# Altium PCB ArmRev2.PcbDoc
Units mm, origin at the board's own origin, x right, y up, seen from the top; angles counter-clockwise.
Board outline 81.53 x 68.07 mm, 2 copper layers (Top Layer, Bottom Layer); 82 components, 52 nets, 280 pads, 92 vias.
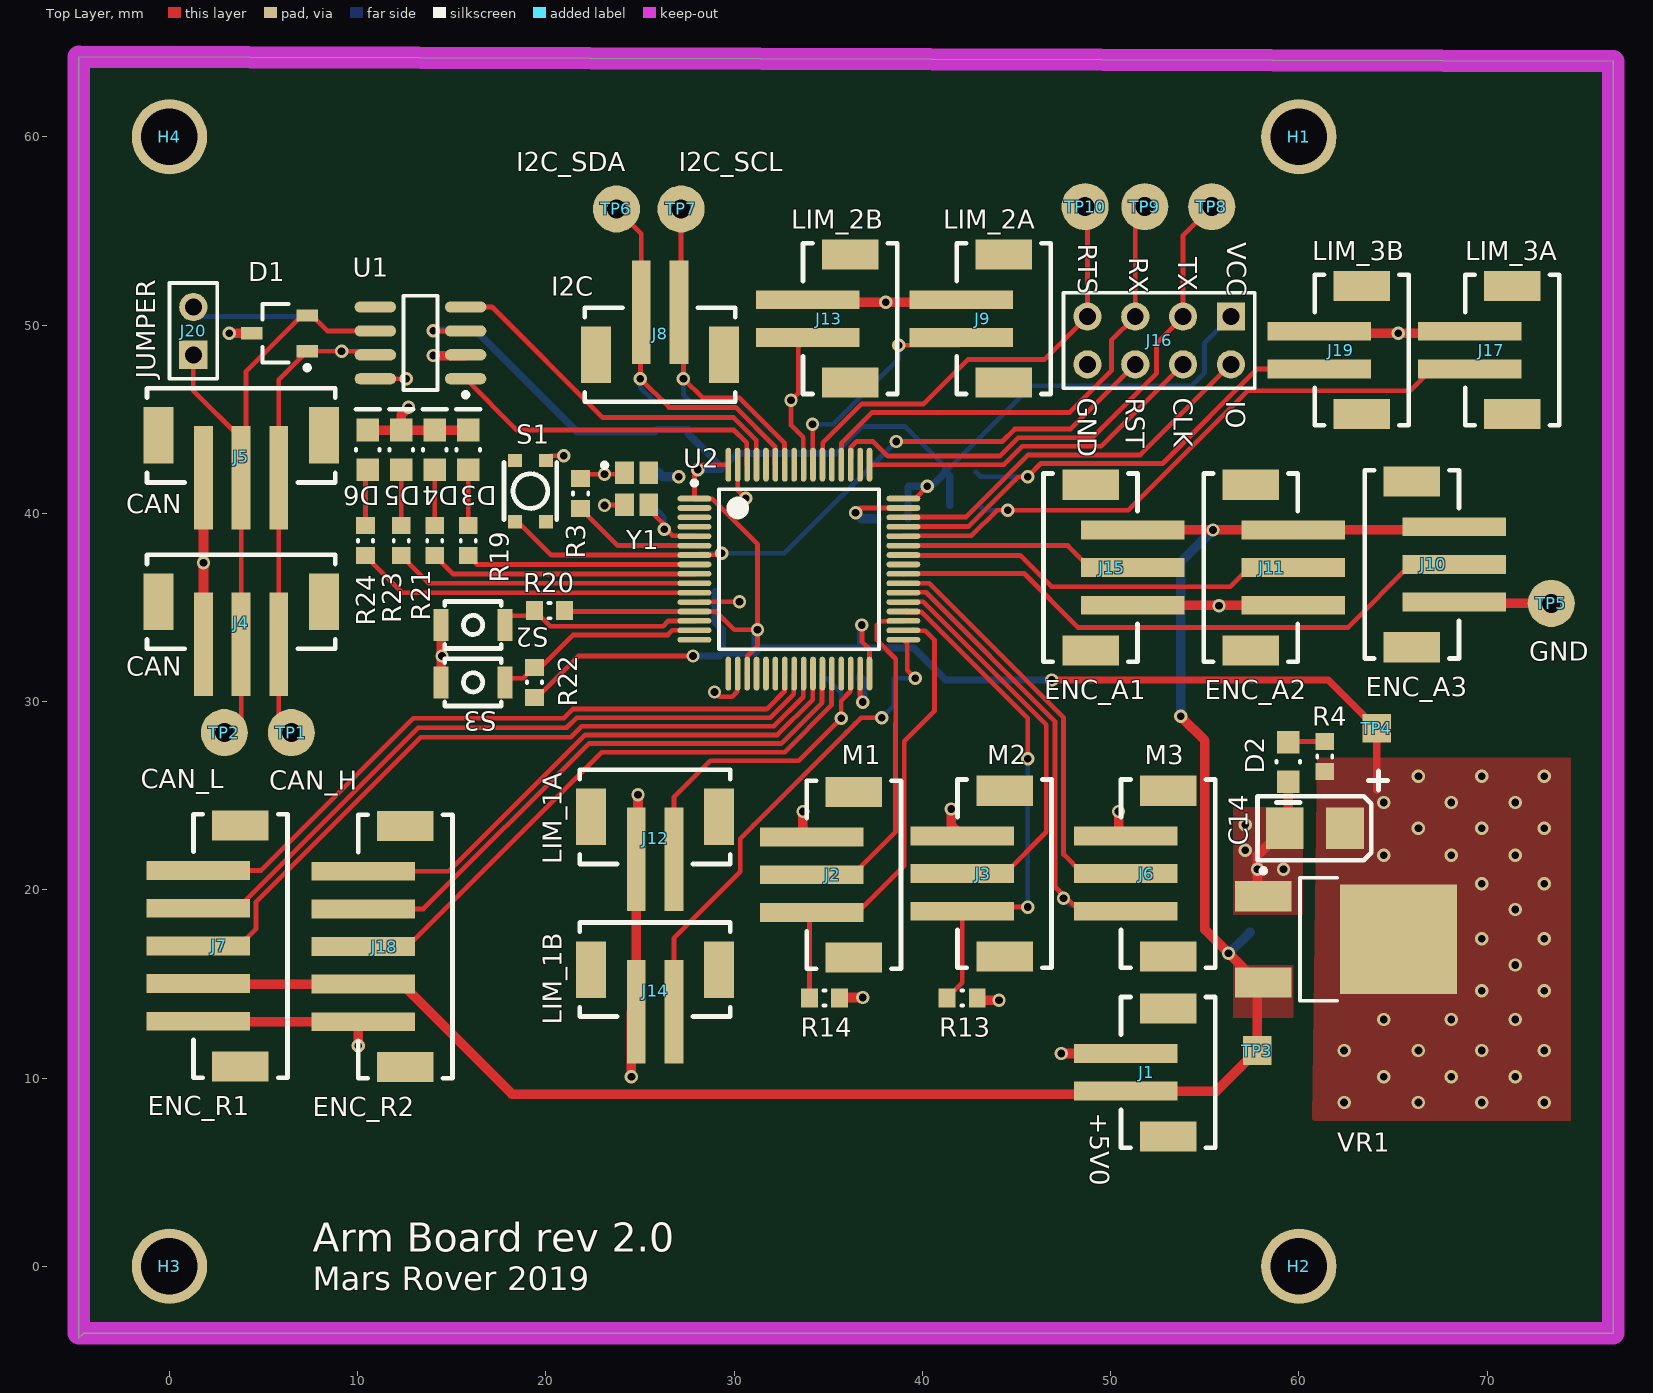
[diagram p0: Top Layer view]
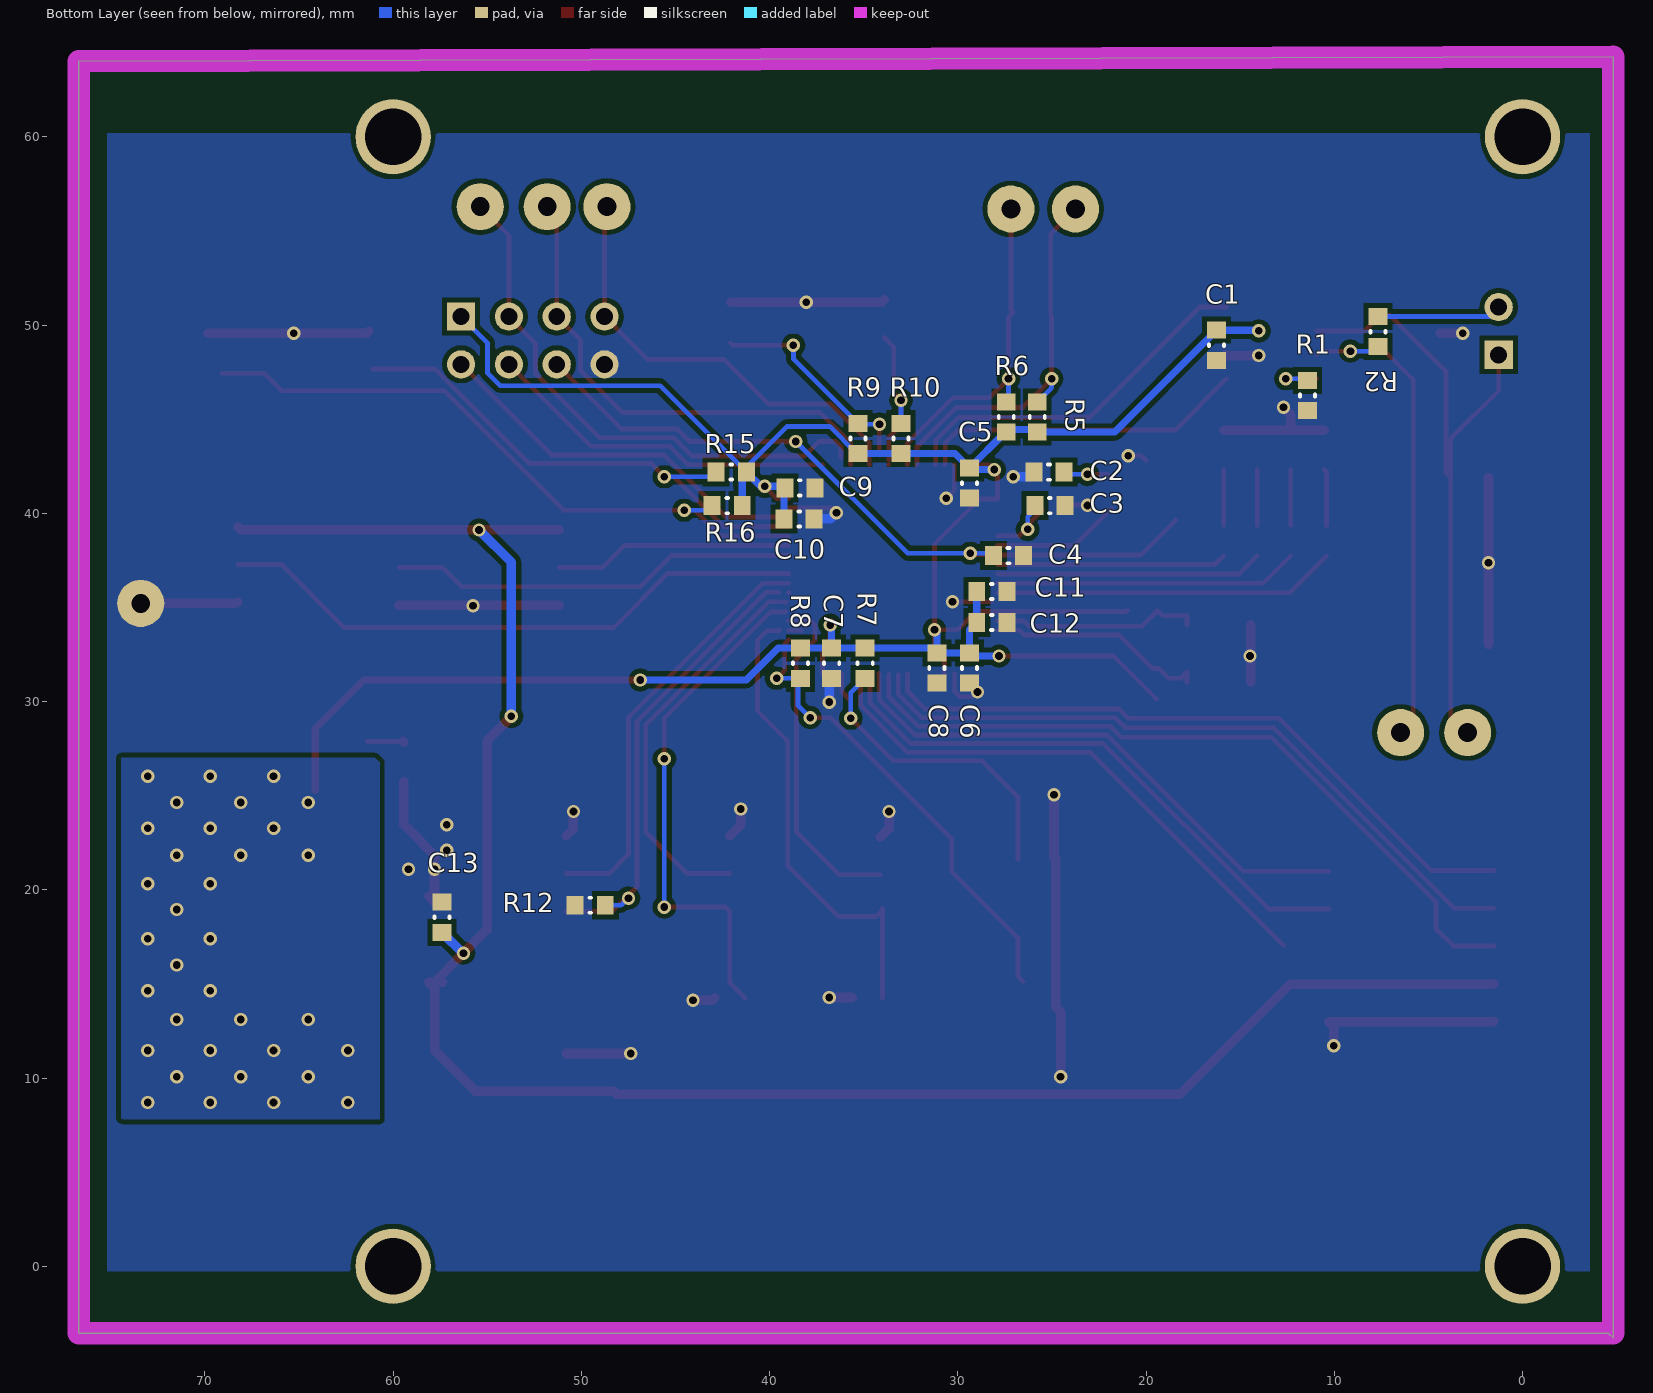
[diagram p1: Bottom Layer view, seen from below]

## Layer stack, top to bottom
Top Solder: solder mask 0.0102, Solder Resist, Dk 3.5
Top Layer: signal copper 0.0356
Dielectric 1: dielectric 0.32, FR-4, Dk 4.8
Bottom Layer: signal copper 0.0356
Bottom Solder: solder mask 0.0102, Solder Resist, Dk 3.5

## Board outline
-4.826,64.262 -4.826,-3.81 -4.572,-3.556 76.708,-3.556 76.708,64.008

## Design rules (kind name [scope] priority, off if disabled: settings)
Clearance Clearance_1 [All] p1: gap=0.254 ignorepadtopadclearanceinfootprint=TRUE except(0: Arc-Hole Track-Hole SMDPad-Hole THPad-Hole Via-Hole Fill-Hole Poly-Hole Region-Hole Text-Hole; 0.203: Arc-Arc Arc-Track Arc-SMDPad Track-Track Track-SMDPad)
HoleSize [All] p1: absolutevalues=TRUE maxlimit=3.5 minlimit=0.025 maxpercent=80.000 minpercent=20.000
PolygonConnect [All] p1: connectstyle=Direct reliefconductorwidth=0.254 reliefentries=4 polygonreliefangle="90 Angle" airgapwidth=0.254
RoutingVias [All] p1: holewidth=0.406 width=0.711 viastyle="Through Hole" minholewidth=0.406 minwidth=0.711 maxholewidth=0.711 maxwidth=1.27
SolderMaskExpansion [All] p1: expansion=0.102
Width [All] p1: maxlimit=0.508 minlimit=0.254 preferedwidth=0.254 minimp=50.000000 maximp=50.000000 favimp=50.000000
29 further rules are at their usual default settings.

## Classes and differential pairs
component class Support: D3 D4 D5 D6 R5 R6 R7 R8 R9 R10 R12 R13 R14 R15 R16 R19 R20 R21 R22 R23 R24 S2 S3 TP6 TP7 TP8 TP9 TP10
component class POWER: C13 C14 D2 R4 TP3 TP4 TP5 VR1
component class MCU: C2 C3 C4 C5 C6 C7 C8 C9 C10 C11 C12 H1 H2 H3 H4 R3 S1 U2 Y1
component class Connectors: J1 J2 J3 J4 J5 J6 J7 J8 J9 J10 J11 J12 J13 J14 J15 J16 J17 J18 J19
component class CAN: C1 D1 J20 R1 R2 TP1 TP2 U1

## Components (designator, comment, footprint, x,y, rotation, side; value= is the part's Value field where it differs from the comment)
C1 "CAP_0.1uF_16V_0603" CAPC0603(1608)55_N 16.256,48.927 r90 bottom value=0.1uF
C2 "CAP_15pF_0603" CAPC0603(1608)55_N 25.159,42.186 r180 bottom value=15pF
C3 "CAP_15pF_0603" CAPC0603(1608)55_N 25.108,40.408 r0 bottom value=15pF
C4 "CAP_0.1uF_16V_0603" CAPC0603(1608)55_N 27.305,37.751 r0 bottom value=0.1uF
C5 "CAP_0.1uF_16V_0603" CAPC0603(1608)55_N 29.375,41.605 r90 bottom value=0.1uF
C6 "CAP_0.1uF_16V_0603" CAPC0603(1608)55_N 29.375,31.782 r90 bottom value=0.1uF
C7 "CAP_0.1uF_16V_0603" CAPC0603(1608)55_N 36.703,32.036 r90 bottom value=0.1uF
C8 "CAP_4.7uF_0603" CAPC0603(1608)55_N 31.115,31.782 r90 bottom value=4.7uF
C9 "CAP_0.1uF_16V_0603" CAPC0603(1608)55_N 38.392,41.351 r0 bottom value=0.1uF
C10 "CAP_0.1uF_16V_0603" CAPC0603(1608)55_N 38.43,39.7 r0 bottom value=0.1uF
C11 "CAP_10nF_0603" CAPC0603(1608)55_N 28.194,35.846 r0 bottom value=10nF
C12 "CAP_1uF_16V_0603" CAPC0603(1608)55_N 28.194,34.195 r0 bottom value=1uF
C13 "CAP_0.33uF_16V_0603" CAPC0603(1608)55_N 57.404,18.542 r270 bottom value=0.33uF
C14 "CAP_10uF_0603_POL" AVX-CAPC3528_V 60.846,23.273 r180 top value=10uF
D1 "TVS_DIODE_CAN" TVS_DIODE_CAN 5.842,49.562 r180 top
D2 "DIO_LED_R" LED_0805_LINE 59.436,26.797 r270 top
D3 "DIO_LED_Y" LED_0805_LINE 15.875,43.373 r90 top
D4 "DIO_LED_G" LED_0805_LINE 14.097,43.373 r90 top
D5 "DIO_LED_G" LED_0805_LINE 12.319,43.373 r90 top
D6 "DIO_LED_G" LED_0805_LINE 10.541,43.373 r90 top
H1 "MOUNTING_HOLES" MOUNTING_HOLE#1 133.604,-13.081 r0 top
H2 "MOUNTING_HOLES" MOUNTING_HOLE#2 1.961,17.836 r0 top
H3 "MOUNTING_HOLES" MOUNTING_HOLE#3 123.063,-13.081 r0 top
H4 "MOUNTING_HOLES" MOUNTING_HOLE#4 1.961,17.836 r0 top
J1 "+5V0" JST-B2B-SM4-TB 55.55,10.303 r90 top
J2 "M1" JST-B3B-SM4-TB 38.862,20.799 r90 top
J3 "M2" JST-B3B-SM4-TB 46.863,20.86 r90 top
J4 "CAN" JST-B3B-SM4-TB 3.81,37.802 r180 top
J5 "CAN" JST-B3B-SM4-TB 3.81,46.641 r180 top
J6 "M3" JST-B3B-SM4-TB 55.55,20.86 r90 top
J7 "ENC_R1" JST-B5B-SM4-TB 6.274,17.018 r90 top
J8 "I2C" JST-B2B-SM4-TB 26.064,45.919 r0 top
J9 "LIM_2A" JST-B2B-SM4-TB 46.823,50.34 r90 top
J10 "ENC_A3" JST-B3B-SM4-TB 63.5,37.283 r270 top
J11 "ENC_A2" JST-B3B-SM4-TB 54.94,37.116 r270 top
J12 "LIM_1A" JST-B2B-SM4-TB 25.797,26.372 r180 top
J13 "LIM_2B" JST-B2B-SM4-TB 38.659,50.34 r90 top
J14 "LIM_1B" JST-B2B-SM4-TB 25.797,18.265 r180 top
J15 "ENC_A1" JST-B3B-SM4-TB 46.431,37.116 r270 top
J16 "HEADER 4X2" HEADER_2X4 56.388,50.451 r180 top
J17 "LIM_3A" JST-B2B-SM4-TB 73.838,48.673 r90 top
J18 "ENC_R2" JST-B5B-SM4-TB 15.037,16.987 r90 top
J19 "LIM_3B" JST-B2B-SM4-TB 65.837,48.673 r90 top
J20 "JUMPER" HDR1X2 1.27,48.419 r90 top
R1 "RES_0R_0603" RESC0603(1608)_N 11.43,46.26 r270 bottom value=0R
R2 "RES_120R_0603" RESC0603(1608)_N 7.681,49.651 r90 bottom value=120R
R3 "RES_0R_0603" RESC0603(1608)_N 21.844,41.053 r90 top value=0R
R4 "RES_100R_0603" RESC0603(1608)_N 61.373,27.083 r270 top value=100R
R5 "RES_4K7_0603" RESC0603(1608)_N 25.781,45.117 r270 bottom value=4K7
R6 "RES_4K7_0603" RESC0603(1608)_N 27.432,45.117 r270 bottom value=4K7
R7 "RES_10K_0603" RESC0603(1608)_N 34.925,32.036 r90 bottom value=10K
R8 "RES_10K_0603" RESC0603(1608)_N 38.354,32.036 r90 bottom value=10K
R9 "RES_10K_0603" RESC0603(1608)_N 35.306,43.974 r270 bottom value=10K
R10 "RES_10K_0603" RESC0603(1608)_N 33.02,43.974 r270 bottom value=10K
R12 "RES_10K_0603" RESC0603(1608)_N 49.53,19.177 r180 bottom value=10K
R13 "RES_10K_0603" RESC0603(1608)_N 42.113,14.256 r180 top value=10K
R14 "RES_10K_0603" RESC0603(1608)_N 34.798,14.256 r180 top value=10K
R15 "RES_10K_0603" RESC0603(1608)_N 42.037,42.196 r180 bottom value=10K
R16 "RES_10K_0603" RESC0603(1608)_N 42.253,40.408 r180 bottom value=10K
R19 "RES_100R_0603" RESC0603(1608)_N 15.875,38.547 r90 top value=100R
R20 "RES_10K_0603" RESC0603(1608)_N 20.193,34.83 r0 top value=10K
R21 "RES_100R_0603" RESC0603(1608)_N 14.097,38.547 r90 top value=100R
R22 "RES_10K_0603" RESC0603(1608)_N 19.393,31.02 r90 top value=10K
R23 "RES_100R_0603" RESC0603(1608)_N 12.319,38.547 r90 top value=100R
R24 "RES_100R_0603" RESC0603(1608)_N 10.414,38.547 r90 top value=100R
S1 "SW_PWR" PTS830GM140 19.177,41.18 r270 top
S2 "SW_TACTILE" B3U-1100P 16.129,34.068 r180 top
S3 "SW_TACTILE" B3U-1100P 16.129,31.02 r180 top
TP1 "CAN_H" TESTPOINT_LOOP 6.477,28.353 r180 top
TP2 "CAN_L" TESTPOINT_LOOP 2.921,28.353 r180 top
TP3 "+5V0" TESTPOINT 57.785,11.462 r0 bottom
TP4 "+3V3" TESTPOINT 64.135,28.575 r0 bottom
TP5 "GND" TESTPOINT_LOOP 73.406,35.211 r270 top
TP6 "I2C_SDA" TESTPOINT_LOOP 23.749,56.166 r0 top
TP7 "I2C_SCL" TESTPOINT_LOOP 27.178,56.166 r0 top
TP8 "UART_TX" TESTPOINT_LOOP 55.372,56.293 r0 top
TP9 "UART_RX" TESTPOINT_LOOP 51.816,56.293 r0 top
TP10 "UART_RTS" TESTPOINT_LOOP 48.641,56.293 r90 top
U1 "IC TXRX CAN" LT-S8_N 13.335,49.054 r180 top
U2 "STM32F091RC" STM_LQFP64_N 33.439,37.033 r0 top
VR1 "5V0_3V3_LDO" VOLTAGE_REGULATOR 60.901,17.37 r270 top
Y1 "CRYSTAL_32MHZ" AVX-CX2520DB32000D0GEJZ1-4_V 24.816,41.297 r0 top

## Footprints (in the part's own frame and the unit in brackets; to place one, negate y for a bottom-side part, rotate by r counter-clockwise, add the part's x,y. Pads: shape width x height; smd on the part's side, far side on the other; paste and mask are expansions set on the pad)
AVX-CAPC3528_V [mm] "SMT Capacitor, 2 Leads, Body 3.5x2.8mm"
  rect 2x2.2 smd: 1(-1.6,0) 2(1.6,0)
  silkscreen extent -3.87,-3.05 3.05,1.7, body extent -1.79,-1.54 1.8,1.54, height 1.9
AVX-CX2520DB32000D0GEJZ1-4_V [mm] "Hand Drawn, 4-Leads,Body 2.5x2mm"
  rect 1x1.2 smd: 1(-0.65,0.85) 2(-0.65,-0.85) 3(0.65,-0.85) 4(0.65,0.85)
  silkscreen extent -1.82,1.13 -1.58,1.38, body extent -1,-1.25 1,1.25, height 0.55
B3U-1100P [mm] "TACTILE SWITCH GREY"
  rect 0.8x1.7 smd: 1(-1.7,0) 2(1.7,0)
  silkscreen extent -1.5,-1.25 1.5,1.25
CAPC0603(1608)55_N [mm] "Chip Capacitor, Body 1.6x0.8mm, Height 0.55mm, IPC Medium Density"
  rect 0.9x1 smd: 1(-0.8,0) 2(0.8,0)
  silkscreen extent -0.05,-0.4 0.05,0.4, body extent -0.87,-0.48 0.88,0.47, height 0.55
HDR1X2 [mm] "Connector; Header; 2 Position"
  rect 1.5x1.5 hole 0.9: 1(0,0)
  round 1.5 hole 0.9: 2(2.54,0)
  silkscreen extent -1.27,-1.27 3.81,1.27
HEADER_2X4 [mm]
  rect 1.5x1.5 hole 0.9: 1(0,0)
  round 1.5 hole 0.9: 2(2.54,0) 3(5.08,0) 4(7.62,0) 5(0,2.54) 6(2.54,2.54) 7(5.08,2.54) 8(7.62,2.54)
  silkscreen extent -1.27,-1.27 8.89,3.81
JST-B2B-SM4-TB [mm]
  rect 1x5.5 smd: 1(-1,4.75) 2(1,4.75)
  rect 1.6x3 smd: 3(-3.4,2.5) 4(3.4,2.5)
  silkscreen extent -4,0 4,5
JST-B3B-SM4-TB [mm]
  rect 1x5.5 smd: 1(-2,4.75) 2(0,4.75) 3(2,4.75)
  rect 1.6x3 smd: 4(-4.4,2.5) 5(4.4,2.5)
  silkscreen extent -5,0 5,5
JST-B5B-SM4-TB [mm]
  rect 1x5.5 smd: 1(-4,4.75) 2(-2,4.75) 3(0,4.75) 4(2,4.75) 5(4,4.75)
  rect 1.6x3 smd: 6(-6.4,2.5) 7(6.4,2.5)
  silkscreen extent -7,0 7,5
LED_0805_LINE [mm] "SMD, 2-Leads, Body 2x1.25mm"
  rect 1.2x1.2 smd: 1(-1.05,0) 2(1.05,0)
  silkscreen extent -0.05,-0.63 2.16,0.64, body extent -1,-0.63 1,0.63, height 0.8
LT-S8_N [mm] "SOP, 8-Leads, Body 4.9x3.9mm, Pitch 1.27mm, IPC Medium Density"
  oval 2.2x0.6 smd: 1(-2.4,1.905) 2(-2.4,0.635) 3(-2.4,-0.635) 4(-2.4,-1.905) 5(2.4,-1.905) 6(2.4,-0.635) 7(2.4,0.635) 8(2.4,1.905)
  silkscreen extent -2.53,-2.5 0.9,2.88, body extent -2,-2.5 2,2.5, height 1.76
MOUNTING_HOLE#1 [mm]
  round 4 hole 3 unplated: 0(-73.604,73.081)
MOUNTING_HOLE#2 [mm]
  round 4 hole 3 unplated: 0(58.039,-17.836)
MOUNTING_HOLE#3 [mm]
  round 4 hole 3 unplated: 0(-123.063,13.081)
MOUNTING_HOLE#4 [mm]
  round 4 hole 3 unplated: 0(-1.961,42.164)
PTS830GM140 [mm] "PWR TACTILE SWITCH (RED)"
  rect 0.7x0.75 smd: 1(-1.625,0.825) 2(1.625,0.825) 3(-1.625,-0.825) 4(1.625,-0.825)
  silkscreen extent -1.53,-1.4 1.53,1.4
RESC0603(1608)_N [mm] "Chip Resistor, Body 1.6x0.8mm, IPC Medium Density"
  rect 0.9x1 smd: 1(-0.8,0) 2(0.8,0)
  silkscreen extent -0.05,-0.4 0.05,0.4, body extent -0.85,-0.47 0.85,0.47, height 0.6
STM_LQFP64_N [mm] "Thin QFP, 64-Leads, Body 10x10mm, Pitch 0.5mm, IPC Medium Density"
  oval 1.8x0.3 smd mask+0.05: 1(-5.55,3.75) 2(-5.55,3.25) 3(-5.55,2.75) 4(-5.55,2.25) 5(-5.55,1.75) 6(-5.55,1.25) 7(-5.55,0.75) 8(-5.55,0.25) 9(-5.55,-0.25) 10(-5.55,-0.75) 11(-5.55,-1.25) 12(-5.55,-1.75) 13(-5.55,-2.25) 14(-5.55,-2.75) 15(-5.55,-3.25) 16(-5.55,-3.75) 33(5.55,-3.75) 34(5.55,-3.25) 35(5.55,-2.75) 36(5.55,-2.25) 37(5.55,-1.75) 38(5.55,-1.25) 39(5.55,-0.75) 40(5.55,-0.25) 41(5.55,0.25) 42(5.55,0.75) 43(5.55,1.25) 44(5.55,1.75) 45(5.55,2.25) 46(5.55,2.75) 47(5.55,3.25) 48(5.55,3.75)
  oval 0.3x1.8 smd mask+0.05: 17(-3.75,-5.55) 18(-3.25,-5.55) 19(-2.75,-5.55) 20(-2.25,-5.55) 21(-1.75,-5.55) 22(-1.25,-5.55) 23(-0.75,-5.55) 24(-0.25,-5.55) 25(0.25,-5.55) 26(0.75,-5.55) 27(1.25,-5.55) 28(1.75,-5.55) 29(2.25,-5.55) 30(2.75,-5.55) 31(3.25,-5.55) 32(3.75,-5.55) 49(3.75,5.55) 50(3.25,5.55) 51(2.75,5.55) 52(2.25,5.55) 53(1.75,5.55) 54(1.25,5.55) 55(0.75,5.55) 56(0.25,5.55) 57(-0.25,5.55) 58(-0.75,5.55) 59(-1.25,5.55) 60(-1.75,5.55) 61(-2.25,5.55) 62(-2.75,5.55) 63(-3.25,5.55) 64(-3.75,5.55)
  silkscreen extent -5.67,-4.25 4.25,4.7, body extent -5,-5 5,5, height 1.6
TESTPOINT [mil]
  rect 60x60 smd far side: 1(0,0)
TESTPOINT_LOOP [mm]
  round 2.5 hole 1: 1(0,0)
TVS_DIODE_CAN [mm] "SOT23, 3-Leads, Body 2.95x2.80mm, Pitch 0.95mm, IPC Low Density"
  rect 1.15x0.65 smd: 1(-1.475,0.95) 2(-1.475,-0.95) 3(1.475,0)
  silkscreen extent -1.6,-1.55 0.9,1.95, body extent -1.5,-1.55 1.5,1.55, height 1.25
VOLTAGE_REGULATOR [mm] "DPAK, 3-Leads, Body 6.095x6.54mm, Pitch 4.57mm"
  rect 1.6x3 smd: 1(-2.285,-2.79) 3(2.285,-2.79)
  rect 5.8x6.2 smd: 2(0,4.39)
  silkscreen extent -3.76,-2.91 3.27,1.14, body extent -3.27,-0.84 3.27,5.25, height 2.38

## Part data
C1 C4 C5 C6 C7 C9 C10: "CAP CER 0.1UF 16V X7R 0603", Digikey Part Number=311-1088-1-ND, Manufacturer=Yageo, MPN=CC0603KRX7R7BB104, Package="0603 (1608 Metric)", Temperature Coefficient=X7R, Voltage Rating=16V, Dimensions="0.063\" L x 0.031\" W (1.60mm x 0.80mm)"
C2 C3: "CAP CER 15PF 250V NPO 0603", Digikey Part Number=311-3282-1-ND, Manufacturer=Yageo, MPN=AC0603JRNPOYBN150, Package="0603 (1608 Metric)", Temperature Coefficient=NP0, Voltage Rating=250v, Dimensions="0.063\" L x 0.031\" W (1.60mm x 0.80mm)"
C8: "CAP CER 4.7UF 6.3V X5R 0603", Digikey Part Number=311-1521-1-ND, Manufacturer=Yageo, MPN=CC0603KRX5R5BB475, Package="0603 (1608 Metric)", Temperature Coefficient=X5R, Voltage Rating=6.3V, Dimensions="0.063\" L x 0.031\" W (1.60mm x 0.80mm)"
C11: "CAP CER 10000PF 16V X7R 0603", Digikey Part Number=311-3369-1-ND, Manufacturer=Yageo, MPN=CC0603KRX7R7BB103, Package="0603 (1608 Metric)", Temperature Coefficient=X7R, Voltage Rating=16V, Dimensions="0.063\" L x 0.031\" W (1.60mm x 0.80mm)"
C12: "CAP CER 1UF 16V Y5V 0603", Digikey Part Number=311-1372-1-ND, Manufacturer=Yageo, MPN=CC0603ZRY5V7BB105, Package="0603 (1608 Metric)", Temperature Coefficient=Y5V, Voltage Rating=16V, Dimensions="0.063\" L x 0.031\" W (1.60mm x 0.80mm)"
C13: "CAP CER 0.33UF 16V X7R 0603", Digikey Part Number=490-6050-1-ND, Manufacturer="Murata Electronics North America", MPN=GCM188R71C334KA37D, Package="0603 (1608 Metric)", Temperature Coefficient=X7R, Voltage Rating=16V, Dimensions="0.063\" L x 0.031\" W (1.60mm x 0.80mm)"
C14: "Capacitor, Tantalum, 10uF 10% 20V MCCT-B (3528)", Digikey Part Number=311-1817-1-ND, Manufacturer=Yageo, MPN=CC0603MRX5R6BB106, Package="0603 (1608 Metric)", Temperature Coefficient=X5R, Voltage Rating=10V, Dimensions="0.063\" L x 0.031\" W (1.60mm x 0.80mm)"
D1: "TVS DIODE 24V 41V SOT323-3", Digikey Part Number=1727-3891-1-ND, Manufacturer="Nexperia USA Inc.", MPN=PESD2CAN,215, Package="SC-70, SOT-323", ComponentLink1Description=Datasheet, ComponentLink1URL=https://assets.nexperia.com/documents/data-sheet/PESD1CAN-U.pdf
D2: "LED RED DIFFUSED 0805 SMD", Digikey Part Number=475-1278-1-ND, Forward Voltage Drop=2V, Manufacturer=OSRAM, MPN="LS R976-NR-1", Package="0805 (2012 Metric)"
D3: "LED YELLOW DIFFUSED 0805 SMD", Digikey Part Number=475-2560-1-ND, Forward Voltage Drop=2.2V, Manufacturer=OSRAM, MPN="LY R976-PS-36", Package="0805 (2012 Metric)"
D4 D5 D6: "LED GREEN DIFFUSED 0805 SMD", Digikey Part Number=475-1410-1-ND, Forward Voltage Drop=2.2V, Manufacturer=OSRAM, MPN="LG R971-KN-1", Package="0805 (2012 Metric)"
H1 H2 H3 H4: "6cm x 6cm"
J1 J8 J9 J12 J13 J14 J17 J19: library part CON_2M_PH_TOP_SMT, "CONN HEADER PH TOP 2POS 2MM SMD", Digikey Part Number=455-1734-1-ND, Manufacturer=JST, MPN=B2B-PH-SM4-TB, ComponentLink1Description=Datasheet, ComponentLink1URL=http://www.jst-mfg.com/product/pdf/eng/ePH.pdf
J2 J3 J4 J5 J6 J10 J11 J15: library part CON_3M_PH_TOP_SMT, "CONN HEADER PH TOP 3POS 2MM SMD", Digikey Part Number=455-1735-1-ND, Manufacturer=JST, MPN=B3B-PH-SM4-TB(LF)(SN), ComponentLink1Description=Datasheet, ComponentLink1URL=http://www.jst-mfg.com/product/pdf/eng/ePH.pdf
J7 J18: library part CON_5M_PH_TOP_SMT, "CONN HEADER PH TOP 5POS 2MM SMD", Digikey Part Number=455-1737-1-ND, Manufacturer=JST, MPN=B5B-PH-SM4-TB(LF)(SN), ComponentLink1Description=Datasheet, ComponentLink1URL=http://www.jst-mfg.com/product/pdf/eng/ePH.pdf
J16: "Header, 4-Pin Dual row", Digikey Part Number=S9015E-04-ND, Manufacturer="Sullins Connector Solutions", MPN=GRPB042VWVN-RC
J20: library part JUMPER_2, "HEADER 2X1"
R1 R3: "RES SMD 0 OHM JUMPER 1/10W 0603", Digikey Part Number=311-0.0GRCT-ND, Manufacturer=Yageo, MPN=RC0603JR-070RL, Package="0603 (1608 Metric)", Dimensions="0.063\" L x 0.031\" W (1.60mm x 0.80mm)"
R2: "RES SMD 120 OHM 5% 1/10W 0603", Digikey Part Number=311-120GRCT-ND, Manufacturer=Yageo, MPN=RC0603JR-07120RL, Package="0603 (1608 Metric)", Tolerance=5%, Dimensions="0.063\" L x 0.031\" W (1.60mm x 0.80mm)"
R4 R19 R21 R23 R24: "RES SMD 100 OHM 1% 1/10W 0603", Digikey Part Number=311-100HRCT-ND, Manufacturer=Yageo, MPN=RC0603FR-07100RL, Package="0603 (1608 Metric)", Tolerance=1%, Dimensions="0.063\" L x 0.031\" W (1.60mm x 0.80mm)"
R5 R6: "RES SMD 4.7K OHM 5% 1/10W 0603", Digikey Part Number=311-4.7KGRCT-ND, Manufacturer=Yageo, MPN=RC0603JR-074K7L, Package="0603 (1608 Metric)", Tolerance=5%, Dimensions="0.063\" L x 0.031\" W (1.60mm x 0.80mm)"
R7 R8 R9 R10 R12 R13 R14 R15 R16 R20 R22: "RES SMD 10K OHM 5% 1/10W 0603", Digikey Part Number=311-10KGRCT-ND, Manufacturer=Yageo, MPN=RC0603JR-0710KL, Package="0603 (1608 Metric)", Tolerance=5%, Dimensions="0.063\" L x 0.031\" W (1.60mm x 0.80mm)"
S1: "Power Switch (Red)", Digikey Part Number=CKN10587CT-ND, Manufacturer=C&K, MPN="PTS830GM140 SMTR LFS", ComponentLink1Description=Datasheet, ComponentLink1URL=https://www.ckswitches.com/media/1478/pts830.pdf
S2 S3: "Tactile Switch (Grey)", Digikey Part Number=SW1021TR-ND, Manufacturer="Omron Electronics Inc-EMC Div", MPN=B3U-1100P
TP1 TP2 TP5 TP6 TP7 TP8 TP9 TP10: library part TESTPOINT_LOOP, "PC TEST POINT MINIATURE WHITE", Digikey Part Number=36-5002-ND, Manufacturer="Keystone Electronics", MPN=5002
TP3 TP4: library part TESTPOINT_SMD
U1: library part LTC2875, "IC TXRX CAN 4MBPS 8SO", Digikey Part Number=LTC2875IS8#PBF-ND, Manufacturer="Linear Technologies", MPN=LTC2875IS8#PBF, Package="8-SOIC (0.154\", 3.90mm Width)", ComponentLink1Description=Datasheet, ComponentLink1URL=https://www.analog.com/media/en/technical-documentation/data-sheets/2875f.pdf
U2: Digikey Part Number=497-15167-ND, Manufacturer=STMicroelectronics, Package=64-LQFP, ComponentLink1Description=Datasheet, ComponentLink1URL=https://www.st.com/content/ccc/resource/technical/document/datasheet/95/3c/2e/5b/21/09/45/a6/DM00115237.pdf/files/DM00115237.pdf/jcr:content/translations/en.DM00115237.pdf#%5B%7B%22num%22%3A96%2C%22gen%22%3A0%7D%2C%7B%22name%22%3A%22XYZ%22%7D%2C67%2C755%2Cnull%5D, MPN=STM32F091RC
VR1: "IC REG LINEAR 3.3V 1A DPAK", Current Output=1A, Digikey Part Number=NCP1117DT33T5GOSCT-ND, Manufacturer="ON Semiconductor", MPN=NCP1117DT33T5G
Y1: "CRYSTAL 32MHZ 8PF SMD", Digikey Part Number=1253-1730-1-ND, Manufacturer="Kyocera International Inc. Electronic Components", MPN=CX2520DB32000D0GPSC1, Package="4-SMD, No Lead", Dimensions="0.098\" L x 0.079\" W (2.50mm x 2.00mm)"

## Via types
v1: diameter 0.711, hole 0.406, Top Layer to Bottom Layer, tented both sides, 92 vias

## Nets (pads, with @x,y where several pads share a name; then routed paths per layer and width w, separated by ;. In a path a pad name is that pad's centre, name@x,y a point inside that pad or via, vN(x,y) a via of type N, cw(c..) or ccw(c..) an arc to the next point about the centre after c; other vN are vias at no path point)
+3V3: C1.2 C5.2 C6.2 C7.2 C8.2 C9.2 C10.2 C11.2 C12.2 C14.1 J16.1 R4.2 R5.2 R6.2 R7.2 R8.2 R9.2 R10.2 R15.2 R16.2 R20.2 R22.1 TP4.1 U1.3 U2.1 U2.13 U2.19 U2.32 U2.48 U2.64 VR1.2 | length 147.7
  Top Layer w0.254: v1(14.01,49.689) U1.3 ; R22.1@19.431,30.131 21.717,32.417 v1(27.813,32.417) ; R20.2 21.04,34.783 U2.13 29.031,34.783 30,33.814 v1(31.242,33.814) ; U2.64 28.327,42.583 v1(28.067,42.323) 27.889,42.145 U2.1 27.889,40.763 28.838,40.763 31.242,38.359 v1(31.242,33.814) ; U2.19 30.709,31.503 30.709,32.432 31.242,32.965 v1(31.242,33.814) ; v1(36.786,34.068) 36.786,33.168 37.189,32.765 U2.32 ; U2.48 39.608,40.783 v1(40.259,41.434)
  Top Layer w0.381: v1(46.863,31.147) 61.563,31.147 TP4.1 64.135,25.273
  Bottom Layer w0.254: R9.2@35.36,43.174 36.801,44.615 39.072,44.615 R15.2@41.237,42.45 ; R15.2 45.821,46.78 54.316,46.78 54.979,47.443 54.979,49.042 J16.1
  Bottom Layer w0.381: v1(14.01,49.689) 14.048,49.727 C1.2 21.666,44.317 R5.2 25.908,44.444 27.559,44.444 27.559,44.221 C5.2 ; v1(27.813,32.417) 29.21,32.417 C6.2 ; v1(28.067,42.323) 29.293,42.323 C5.2 ; C11.2 C12.2 29.375,33.814 C6.2 ; v1(31.242,33.814) 31.115,33.687 C8.2 ; R9.2@35.36,43.174 R9.2 R10.2 30.144,43.174 C5.2 ; v1(36.786,34.068) 36.703,33.985 C7.2 ; C10.2 39.23,41.389 39.275,41.434 v1(40.259,41.434) 40.475,41.434 R15.2 ; R15.2@41.237,42.45 R15.2 ; R16.2 41.453,41.98 R15.2 ; v1(46.863,31.147) 41.243,31.147 39.554,32.836 R8.2 C7.2 ; C6.2 C8.2 ; C8.2 31.369,32.836 R7.2 C7.2
  other v1: 62.4,8.7 66.35,8.7 69.715,8.7 73.025,8.7 64.5,10.065 68.1,10.065 71.5,10.065 62.4,11.462 66.35,11.462 69.715,11.462 73.025,11.462 64.5,13.107 68.1,13.107 71.5,13.107 69.715,14.637 73.025,14.637 71.5,16.002 69.715,17.399 73.025,17.399 71.5,18.955 69.715,20.32 73.025,20.32 64.516,21.844 68.1,21.844 71.5,21.844 66.35,23.273 69.715,23.273 73.025,23.273 64.516,24.638 68.1,24.638 71.5,24.638 66.35,26.035 69.715,26.035 73.025,26.035
+5V0: C13.2 J1.1 J7.2 J10.1 J11.1 J15.1 J18.2 TP3.1 VR1.3 | length 109.3
  Top Layer w0.508: J7.2 1.555,14.987 J18.2 12.35,14.987 18.193,9.144 48.133,9.144 48.292,9.303 J1.1 55.626,9.303 TP3.1 57.785,14.759 VR1.3 VR1.3@57.813,15.085 ; J15.1 v1(55.435,39.116) J11.1 68.083,39.116 J10.1 ; v1(53.721,29.21) 55.007,27.924 55.007,17.891 v1(56.261,16.637) VR1.3@57.813,15.085 ; VR1.3@57.376,15.085 VR1.3@57.813,15.085
  Bottom Layer w0.508: v1(53.721,29.21) 53.721,37.401 v1(55.435,39.116) ; v1(56.261,16.637) 56.299,16.637 C13.2
BUTTON_1: R20.1 S2.1 U2.14 | length 11.1
  Top Layer w0.254: S2.1 17.829,34.558 19.121,34.558 R20.1 20.223,34 26.221,34 26.504,34.283 U2.14
BUTTON_2: R22.2 S3.1 U2.15 | length 11.8
  Top Layer w0.254: S3.1 17.829,31.577 18.164,31.242 18.789,31.242 19.297,31.75 19.653,31.75 21.446,33.543 26.481,33.543 26.721,33.783 U2.15
GND: C1.1 C2.1 C3.1 C4.1 C5.1 C6.1 C7.1 C8.1 C9.1 C10.1 C11.1 C12.1 C13.1 C14.2 D1.3 D2.2 D3.2 D4.2 D5.2 D6.2 J1.2 J2.3 J3.3 J4.3 J5.3 J6.3 J7.1 J9.2 J10.3 J11.3 J12.2 J13.2 J14.2 J15.3 J16.8 J17.2 J18.1 J19.2 R1.2 R12.1 R13.1 R14.1 S1.1 S2.2 S3.2 TP5.1 U1.2 U2.12 U2.18 U2.31 U2.47 U2.63 VR1.1 Y1.2 | length 111.9
  Top Layer w0.254: U1.2 U1.2@15.773,48.381 ; S1.1 20.25,43.053 v1(20.955,43.053) ; v1(23.114,40.418) 23.143,40.447 Y1.2 ; U2.12@28.195,35.302 v1(30.281,35.302) ; v1(28.956,30.507) 29.21,30.253 29.888,30.253 30.169,30.534 30.169,31.463 U2.18 ; U2.63 30.189,41.217 v1(30.607,40.799) ; v1(36.449,40.037) 36.695,40.283 U2.47 ; U2.31 36.689,30.113 v1(36.83,29.972) ; C14.2 C14.2@59.436,23.463
  Top Layer w0.508: J7.1 1.555,12.987 J18.1 J18.1 10.033,12.731 v1(10.033,11.716) ; J4.3 v1(1.81,37.37) J5.3 ; v1(3.175,49.562) D1.3 ; D6.2 D5.2 ; v1(12.7,45.625) 12.319,45.244 D5.2 ; v1(14.01,48.381) 15.697,48.381 U1.2 ; S3.2 S2.2 ; D3.2 D4.2 D5.2 ; v1(24.543,10.065) 24.543,13.515 24.797,13.769 J12.2 24.892,21.717 v1(24.892,25.051) ; v1(33.655,24.162) 33.655,23.256 J2.3 ; J13.2 34.036,51.213 v1(38.055,51.213) J9.2@42.073,51.213 ; R14.1 35.619,14.277 v1(36.83,14.277) ; v1(41.529,24.289) 41.529,23.444 J3.3 ; R13.1 43.04,14.129 v1(44.069,14.129) ; v1(47.371,11.303) J1.2 ; v1(50.419,24.162) 50.419,23.241 J6.3 ; J15.3 J11.3 ; VR1.1@57.785,19.329 VR1.1 ; VR1.1@57.802,19.655 57.802,21.829 C14.2 ; C14.2@59.436,23.463 D2.2 ; J19.2@61.29,49.673 61.401,49.562 v1(65.278,49.562) J17.2@69.85,49.562 ; J10.3 68.322,35.211 TP5.1
  Bottom Layer w0.254: C3.1@24.298,40.418 C3.1
  Bottom Layer w0.508: C2.1 26.203,41.942 v1(27.051,41.942) ; v1(36.449,40.037) 36.786,39.7 C10.1 ; C7.1 36.957,30.982 36.83,30.855 v1(36.83,29.972)
  other v1: 57.802,21.082 59.182,21.082 57.15,22.098 57.15,23.463 14.478,32.417 55.753,35.084
I2C_SCL: J8.2 R6.1 TP7.1 U2.58 | length 18.3
  Top Layer w0.254: TP7.1 27.178,50.783 J8.2 27.305,50.428 v1(27.305,47.149) 28.321,46.133 30.281,46.133 32.669,43.745 32.669,42.603 U2.58
  Bottom Layer w0.254: v1(27.305,47.149) 27.305,46.298 R6.1@27.559,46.044
I2C_SDA: J8.1 R5.1 TP6.1 U2.59 | length 20.5
  Top Layer w0.254: TP6.1 25.064,54.851 J8.1 ; J8.1@25.019,50.486 v1(25.019,47.149) 26.543,45.625 30.087,45.625 32.169,43.543 32.169,42.603 U2.59
  Bottom Layer w0.254: v1(25.019,47.149) 25.019,46.679 R5.1
LED_1: R19.1 U2.8 | length 12.2
  Top Layer w0.254: R19.1 16.339,37.283 U2.8
LED_2: R21.1 U2.9 | length 14.2
  Top Layer w0.254: R21.1 15.061,36.783 U2.9
LED_3: R23.1 U2.10 | length 16.2
  Top Layer w0.254: R23.1 13.783,36.283 U2.10
LED_4: R24.1 U2.11 | length 18.3
  Top Layer w0.254: R24.1 12.378,35.783 U2.11
LIM_1A: J12.1 R7.1 U2.30 | length 18.9
  Top Layer w0.254: J12.1 26.797,24.924 28.727,26.854 33.426,26.854 v1(35.687,29.115) 35.687,30.052 36.169,30.534 36.169,31.463 U2.30
  Bottom Layer w0.254: R7.1 35.687,30.474 v1(35.687,29.115)
LIM_1B: J14.1 R8.1 U2.33 | length 25.1
  Top Layer w0.254: J14.1@26.543,15.145 26.797,15.399 26.797,17.431 30.327,20.961 30.327,22.714 31.032,23.418 31.032,23.436 35.974,28.378 35.992,28.378 36.424,28.81 36.424,28.828 36.739,29.143 v1(37.846,29.143) ; U2.33 39.192,33.08 39.192,31.668 v1(39.624,31.236)
  Bottom Layer w0.254: v1(37.846,29.143) 38.497,29.794 38.497,31.236 v1(39.624,31.236)
LIM_2A: J9.1 R9.1 U2.55 | length 11.8
  Top Layer w0.254: v1(34.163,44.736) 34.169,44.73 U2.55@34.169,43.085 ; v1(38.735,48.927) 41.959,48.927 J9.1@42.073,49.041
  Bottom Layer w0.254: v1(34.163,44.736) 35.268,44.736 R9.1 38.735,48.203 v1(38.735,48.927)
LIM_2B: J13.1 R10.1 U2.56 | length 8.4
  Top Layer w0.254: U2.56@33.669,42.603 U2.56 ; U2.56@33.669,42.831 33.669,44.04 33.02,44.69 v1(33.02,46.006) 33.401,46.387 33.401,48.832 J13.1
  Bottom Layer w0.254: R10.1 v1(33.02,46.006)
LIM_3A: J17.1 R16.1 U2.44 | length 35.3
  Top Layer w0.254: U2.44 39.009,38.803 42.606,38.803 43.967,40.164 v1(44.539,40.164) 50.93,40.164 57.28,46.514 65.913,46.514 66.842,47.443 J17.1@69.088,47.443
  Bottom Layer w0.254: R16.1 43.297,40.164 v1(44.539,40.164)
LIM_3B: J19.1 R15.1 U2.45 | length 28.4
  Top Layer w0.254: U2.45 39.009,39.303 42.459,39.303 45.098,41.942 v1(45.593,41.942) 46.297,42.646 52.758,42.646 57.785,47.673 J19.1
  Bottom Layer w0.254: R15.1 43.091,41.942 v1(45.593,41.942)
NetC2_2: C2.2 R3.2 Y1.1 | length 3.7
  Top Layer w0.254: R3.2 22.06,42.069 v1(23.114,42.069) 24.088,42.069 Y1.1
  Bottom Layer w0.254: v1(23.114,42.069) 24.242,42.069 C2.2
NetC3_2: C3.2 U2.5 Y1.3 | length 4.1
  Top Layer w0.254: Y1.3@25.527,40.164 26.289,39.402 v1(26.289,39.148) 26.382,39.148 26.727,38.803 27.877,38.803 U2.5@27.889,38.791
  Bottom Layer w0.254: C3.2@25.969,40.125 26.289,39.805 v1@26.289,39.236
NetC4_2: C4.2 J16.7 S1.4 U2.7 | length 39.1
  Top Layer w0.254: S1.4@18.434,39.637 20.288,37.783 U2.7 27.909,37.803 29.262,37.803 v1(29.337,37.878) ; v1(38.608,43.815) 44.236,43.815 44.896,44.475 45.078,44.475 45.085,44.482 47.879,44.482 J16.7
  Bottom Layer w0.254: C4.2 28.232,37.878 v1(29.337,37.878) 32.671,37.878 v1(38.608,43.815)
NetD1_1: D1.1 J4.1 J5.1 R2.1 TP1.1 U1.7 | length 27.4
  Top Layer w0.254: TP1.1@5.81,28.004 TP1.1@5.81,29.02 ; TP1.1 TP1.1@5.81,29.02 ; U1.7 10.742,48.612 v1(9.144,48.612) D1.1 5.81,47.105 J5.1 J4.1 TP1.1@5.81,29.02
  Bottom Layer w0.254: R2.1 7.92,48.612 v1(9.144,48.612)
NetD1_2: D1.2 J4.2 J5.2 J20.1 TP2.1 U1.6 | length 35.4
  Top Layer w0.254: J20.1 1.27,46.514 3.81,43.974 J5.2 ; TP2.1@3.81,28.226 J4.2 J5.2 ; U1.6 8.382,49.689 7.559,50.512 D1.2 7.046,50.512 4.064,47.53 4.064,42.145 J5.2
NetD2_1: D2.1 R4.1 | length 2
  Top Layer w0.254: D2.1@59.472,27.883 R4.1
  Top Layer w0.508: D2.1 D2.1@59.472,27.883
NetD3_1: D3.1 R19.2 | length 3
  Top Layer w0.254: R19.2 D3.1
NetD4_1: D4.1 R21.2 | length 3
  Top Layer w0.254: R21.2 D4.1
NetD5_1: D5.1 R23.2 | length 3
  Top Layer w0.254: R23.2 D5.1
NetD6_1: D6.1 R24.2 | length 3
  Top Layer w0.254: R24.2 10.414,42.196 D6.1
NetJ2_1: J2.1 R14.2 U2.34 | length 25.7
  Top Layer w0.254: R14.2 J2.1@33.998,19.018 ; J2.1 34.337,18.574 36.322,18.574 39.033,21.285 39.033,27.889 40.64,29.496 40.64,33.274 40.151,33.763 39.457,33.763 U2.34@39.497,33.803 ; U2.34@38.334,33.763 38.354,33.783 U2.34 U2.34@38.989,33.763
NetJ2_2: J2.2 U2.35 | length 18.3
  Top Layer w0.254: J2.2 36.302,20.799 38.575,23.072 38.575,28.831 38.583,28.838 38.583,32.26 37.592,33.251 37.592,34.062 37.793,34.263 38.989,34.263 U2.35
NetJ3_1: J3.1 R13.2 U2.36 | length 27.4
  Top Layer w0.254: U2.36@39.156,34.803 39.156,34.763 39.938,34.763 45.593,29.108 v1(45.593,26.956) ; R13.2 42.113,15.056 J3.1 42.335,19.082 v1(45.593,19.082)
  Bottom Layer w0.254: v1(45.593,19.082) v1(45.593,26.956)
NetJ3_2: J3.2 U2.37 | length 21.2
  Top Layer w0.254: U2.37@39.116,35.303 U2.37@39.156,35.263 ; U2.37@39.243,35.303 40.045,35.303 46.584,28.764 46.584,23.07 44.374,20.86 J3.2
NetJ6_1: J6.1 R12.2 U2.38 | length 24.9
  Top Layer w0.254: U2.38@38.969,35.803 U2.38 ; U2.38@39.497,35.803 40.191,35.803 47.041,28.953 47.041,20.174 48.355,18.86 J6.1
  Bottom Layer w0.254: v1(47.498,19.558) 47.879,19.177 R12.2
NetJ6_2: J6.2 U2.39 | length 22.5
  Top Layer w0.254: U2.39 40.358,36.283 47.498,29.143 47.498,21.876 48.514,20.86 J6.2
NetJ7_3: J7.3 U2.25 | length 39.7
  Top Layer w0.254: J7.3 3.683,17.018 4.604,17.939 4.604,19.357 13.347,28.099 21.313,28.099 21.897,28.683 32.111,28.683 33.669,30.241 U2.25@33.669,31.439
NetJ7_4: J7.4 U2.24 | length 37.4
  Top Layer w0.254: J7.4 3.619,19.018 13.208,28.607 21.094,28.607 21.627,29.14 31.922,29.14 33.169,30.388 U2.24@33.169,31.439
NetJ7_5: J7.5 U2.23 | length 36
  Top Layer w0.254: J7.5 4.857,21.018 12.954,29.115 20.955,29.115 21.437,29.597 31.732,29.597 32.669,30.534 32.669,31.463 U2.23
NetJ10_2: J10.2 U2.40 | length 31.8
  Top Layer w0.254: U2.40 39.009,36.803 45.398,36.803 48.26,33.941 62.611,33.941 65.953,37.283 J10.2
NetJ11_2: J11.2 U2.42 | length 21.8
  Top Layer w0.254: U2.42 39.009,37.763 45.2,37.763 46.863,36.1 56.356,36.1 57.372,37.116 J11.2
NetJ15_2: J15.2 U2.43 | length 12.7
  Top Layer w0.254: U2.43 47.728,38.283 48.895,37.116 J15.2
NetJ16_5: J16.5 U2.46 | length 20.8
  Top Layer w0.254: U2.46 39.009,39.803 42.313,39.803 45.613,43.103 51.58,43.103 J16.5
NetJ16_6: J16.6 U2.49 | length 18.9
  Top Layer w0.254: U2.49 44.329,42.583 45.307,43.561 49.498,43.561 J16.6
NetJ18_3: J18.3 U2.28 | length 29.5
  Top Layer w0.254: J18.3@12.682,17.032 22.961,27.311 32.679,27.311 35.169,29.801 35.169,31.463 U2.28
NetJ18_4: J18.4 U2.27 | length 30.5
  Top Layer w0.254: J18.4 13.494,18.987 22.275,27.768 32.49,27.768 34.669,29.948 34.669,31.463 U2.27
NetJ18_5: J18.5 U2.26 | length 29.1
  Top Layer w0.254: J18.5 14.847,20.987 22.086,28.226 32.3,28.226 34.169,30.094 34.169,31.463 U2.26
NetJ20_2: J20.2 R2.2 | length 6.6
  Bottom Layer w0.254: J20.2 1.778,50.451 R2.2
NetR1_1: R1.1 U1.8 | length 2.8
  Top Layer w0.254: U1.8 v1(12.573,47.149)
  Bottom Layer w0.254: R1.1 11.519,47.149 v1(12.573,47.149)
NetR3_1: R3.1 U2.6 | length 6.9
  Top Layer w0.254: R3.1 23.814,38.283 U2.6
NetU1_1: U1.1 U2.62 | length 17.5
  Top Layer w0.254: U1.1 18.461,44.423 29.991,44.423 30.669,43.745 30.669,42.583 U2.62
NetU1_4: U1.4 U2.61 | length 19.7
  Top Layer w0.254: U1.4 17.145,50.959 23.016,45.088 29.972,45.088 31.169,43.891 31.169,42.603 U2.61
UART_RTS: J16.4 TP10.1 U2.54 | length 23.9
  Top Layer w0.254: U2.54 34.709,42.603 34.709,43.745 36.774,45.81 40.063,45.81 42.418,48.165 46.482,48.165 J16.4 48.768,56.166 TP10.1
UART_RX: J16.3 TP9.1 U2.52 | length 26.5
  Top Layer w0.254: U2.52 35.709,42.583 35.709,43.745 37.317,45.353 47.809,45.353 50.038,47.582 50.038,49.181 J16.3 51.308,55.785 TP9.1
UART_TX: J16.2 TP8.1 U2.51 | length 29.1
  Top Layer w0.254: U2.51@36.209,42.958 36.209,43.532 36.49,43.813 37.388,43.813 38.161,43.04 44.107,43.04 45.085,44.018 49.014,44.018 52.439,47.443 52.439,49.042 J16.2 53.848,54.769 TP8.1
pads on no net: H1.0 H2.0 H3.0 H4.0 J1.3 J1.4 J2.4 J2.5 J3.4 J3.5 J4.4 J4.5 J5.4 J5.5 J6.4 J6.5 J7.6 J7.7 J8.3 J8.4 J9.3 J9.4 J10.4 J10.5 J11.4 J11.5 J12.3 J12.4 J13.3 J13.4 J14.3 J14.4 J15.4 J15.5 J17.3 J17.4 J18.6 J18.7 J19.3 J19.4 S1.2 S1.3 U1.5 U2.2 U2.3 U2.4 U2.16 U2.17 U2.20 U2.21 U2.22 U2.29 U2.41 U2.50 U2.53 U2.57 U2.60 Y1.4

## Polygon pours and split planes (outlines as drawn)
+5V0 on Top Layer "gnd-top-vr" (solid, remove dead copper, pour order 4): 59.69,13.202 56.515,13.202 56.515,15.996 59.69,15.996
GND on Top Layer "gnd-top-vr" (solid, remove dead copper, pour order 3): 56.515,24.384 60.198,24.384 60.198,18.669 56.515,18.669
+3V3 on Top Layer "top-3v3" (solid, pour order 1): 60.973,27.022 61.1,27.022 74.435,27.022 74.435,7.718 74.054,7.718 60.719,7.718
+3V3 on Bottom Layer "Bottom Layer-+3V3" (solid, pour order 0): 60.973,27.022 60.72,26.769 60.72,7.808 74.345,7.808 74.435,7.718 74.435,27.022
GND on Bottom Layer "GND" (solid, remove dead copper, pour order 2): -3.556,60.198 75.184,60.198 75.184,-0.254 -3.556,-0.254

## Keep-outs
Keep-Out Layer:
  lines w1.2: -4.826,-3.556 -4.826,64.262 76.708,64.008 76.708,-3.556 -4.826,-3.556

## Silkscreen, mask and mechanical layers (free items; w line width, h text height)
Top Overlay:
  text "Arm Board rev 2.0" at 7.62,0.762 h1.52
  text "Mars Rover 2019" at 7.62,-1.27 h1.27

## Text inside footprints (layer, text, board x,y; h text height)
J16: Top Overlay "TX" at 53.588,53.603 h1.02 r270; Top Overlay "RX" at 50.988,53.603 h1.02 r270; Top Overlay "RTS" at 48.288,54.33 h1.02 r270; Top Overlay "IO" at 56.134,45.974 h1.02 r270; Top Overlay "CLK" at 53.34,46.133 h1.02 r270; Top Overlay "RST" at 50.8,46.133 h1.02 r270; Top Overlay "VCC" at 56.188,54.405 h1.02 r270; Top Overlay "GND" at 48.26,46.133 h1.02 r270